# EAGLE board CH4D3M0 Rev 1.1 (EAGLE 7.7.0)
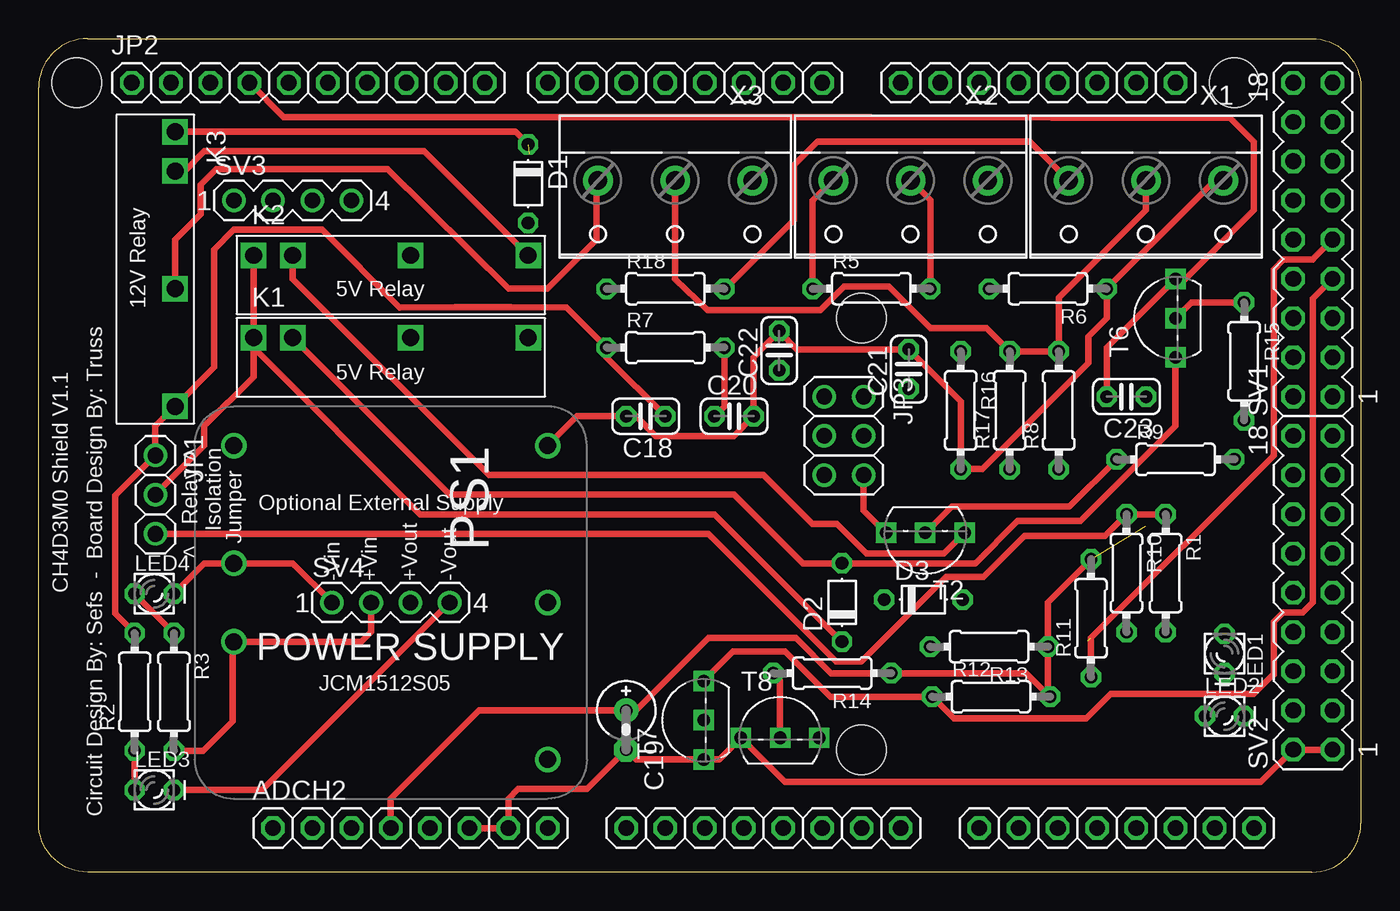
[diagram p0: board, top side]
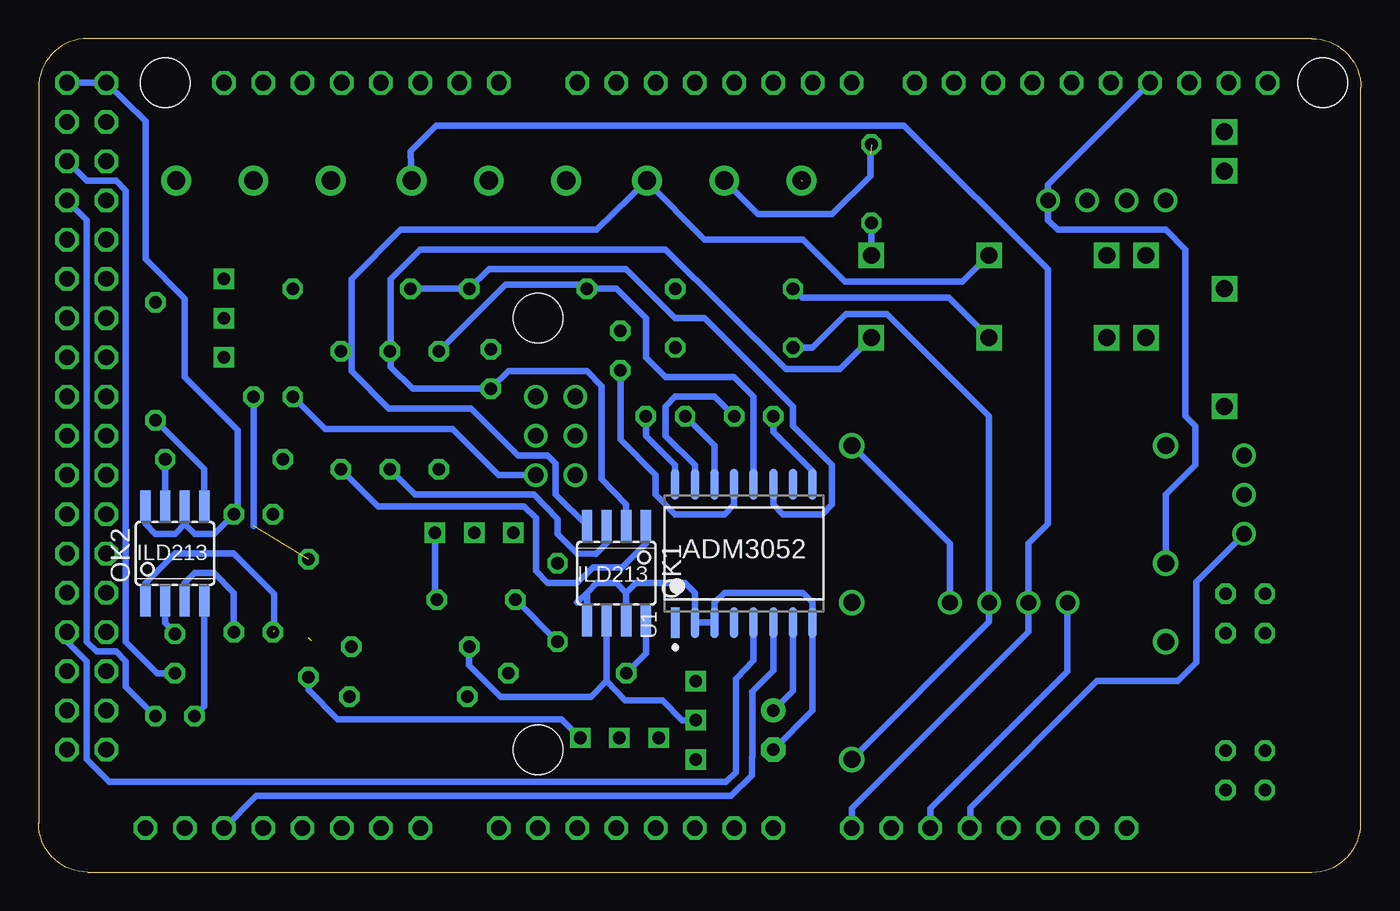
[diagram p1: board, bottom side, seen from below]

Size 85.6 x 53.97 mm. Coordinates in mm from the lower left corner, seen from the top.
Outline: 3.18,53.97 arc90 0,50.8 0,3.18 arc90 3.18,0 82.42,0 arc90 85.6,3.18 85.6,50.8 arc90 82.42,53.97 3.18,53.97
Copper layers (1*16): Top 0.035mm / dielectric 1.5mm / Bottom 0.035mm
Design rules "default *": minimum track width 0.15mm, minimum drill 0.3mm, track to track 0.15mm, track to pad 0.15mm, pad to pad 0.15mm, via to via 0.15mm, smd to smd 0.15mm, copper to edge 0.6mm, drill to drill 0.3mm, minimum pad ring 10mil, minimum via ring 10mil, stop-mask expansion 2mil, vias tented up to drill 1mil, thermal gap 10mil
Net classes: 0 default: width 0.15 mm, drill 0.3 mm, clearance 0.205 mm
Holes 3.2 mm at 2.48,51.12 77.41,51.12 53.28,35.88 53.28,7.94

## Footprints (pad centres in the part's own frame; a part is rotated, then mirrored left to right if it is on the bottom)
1X08 = drill 1.016 octagon: 1 -8.89,0; 2 -6.35,0; 3 -3.81,0; 4 -1.27,0; 5 1.27,0; 6 3.81,0; 7 6.35,0; 8 8.89,0
C025-024X044 = drill 0.813 octagon: 1 -1.27,0; 2 1.27,0
E2,5RE = drill 0.813 pad 1.575: + -1.27,0 | drill 0.813 pad 1.575 octagon: - 1.27,0
D-5 = drill 0.813 octagon: A 2.54,0; C -2.54,0
1X03 = drill 1.016: 1 -2.54,0; 2 0,0; 3 2.54,0
1X10 = drill 1.016 octagon: 1 -11.43,0; 2 -8.89,0; 3 -6.35,0; 4 -3.81,0; 5 -1.27,0; 6 1.27,0; 7 3.81,0; 8 6.35,0; 9 8.89,0; 10 11.43,0
2X03 = drill 1.016: 1 -2.54,-1.27; 2 -2.54,1.27; 3 0,-1.27; 4 0,1.27; 5 2.54,-1.27; 6 2.54,1.27
G6DN-1A = drill 1.1 square: 1 -8.89,1.27; 2 -6.35,1.27; 5 1.27,1.27; 8 8.89,1.27
LED_LD260 = drill 0.813 octagon: A -1.27,0; K 1.27,0
SOIC08 = smd 0.66 x 2.032: 1 -1.905,-3.073; 2 -0.635,-3.073; 3 0.635,-3.073; 4 1.905,-3.073; 5 1.905,3.073; 6 0.635,3.073; 7 -0.635,3.073; 8 -1.905,3.073
JCMXX = drill 1.1: 1 2.54,-10.16; 2 -2.54,-10.16; 3 -10.16,-10.16; 4 10.16,10.16; 5 0,10.16; 6 -10.16,10.16
0204/7 = drill 0.813 octagon: 1 -3.81,0; 2 3.81,0
MA09-2 = drill 1.016 octagon: 1 -10.16,-1.27; 2 -10.16,1.27; 3 -7.62,-1.27; 4 -7.62,1.27; 5 -5.08,-1.27; 6 -5.08,1.27; 7 -2.54,-1.27; 8 -2.54,1.27; 9 0,-1.27; 10 0,1.27; 11 2.54,-1.27; 12 2.54,1.27; 13 5.08,-1.27; 14 5.08,1.27; 15 7.62,-1.27; 16 7.62,1.27; 17 10.16,-1.27; 18 10.16,1.27
MA04-1 = drill 1.016: 1 -3.81,0; 2 -1.27,0; 3 1.27,0; 4 3.81,0
TO92-CBE = drill 0.813 square: B 0,0; C -2.54,0; E 2.54,0
TO92-EBC-OVAL = drill 0.813 square: B 0,-1.27; C 2.54,-1.27; E -2.54,-1.27
ANALOG_DEVICES_INC_ADM3052_0 = smd 1.998 x 0.542: 1 -4.478,4.445; 2 -4.478,3.175; 3 -4.478,1.905; 4 -4.478,0.635; 5 -4.478,-0.635; 6 -4.478,-1.905; 7 -4.478,-3.175; 8 -4.478,-4.445; 9 4.478,-4.445; 10 4.478,-3.175; 11 4.478,-1.905; 12 4.478,-0.635; 13 4.478,0.635; 14 4.478,1.905; 15 4.478,3.175; 16 4.478,4.445
W237-103 = drill 1.194 pad 1.93: 1 -5,-1.29; 2 0,-1.29; 3 5,-1.29

## Placement (x,y rotation side)
ADCH  [1X08]  69.79,2.86 0 top
ADCH2  [1X08]  24.07,2.86 0 top
ADCL  [1X08]  46.93,2.86 0 top
C18  100nF  [C025-024X044]  39.31,29.53 180 top
C19  22 uF  [E2,5RE]  38.04,9.21 270 top
C20  10 uF  [C025-024X044]  45.02,29.53 0 top
C21  47 nF  [C025-024X044]  56.33,32.57 90 top
C22  10 uF  [C025-024X044]  47.94,33.78 90 top
C23  100 nF  [C025-024X044]  70.42,30.8 180 top
COMMUNICATION  [1X08]  64.71,51.12 180 top
D1  [D-5]  31.69,44.58 270 top
D2  [D-5]  52.01,17.46 90 top
D3  [D-5]  57.28,17.65 0 top
JP1  [1X03]  7.56,24.45 270 top
JP2  [1X10]  17.46,51.12 0 top
JP3  [2X03]  52.13,28.26 270 top
K1  [G6DN-1A]  22.8,33.34 0 top
K2  [G6DN-1A]  22.8,38.67 0 top
K3  [G6DN-1A]  7.56,39.05 270 top
LED1  [LED_LD260]  76.77,14.16 270 top
LED2  [LED_LD260]  76.77,10.1 0 top
LED3  [LED_LD260]  7.49,5.33 0 top
LED4  [LED_LD260]  7.49,18.03 0 top
OK1  ILD213  [SOIC08]  48.2,19.37 180 bottom
OK2  ILD213  [SOIC08]  76.77,20.64 0 bottom
PS1  JCM1512S05  [JCMXX]  22.8,17.46 270 top
PWML  [1X08]  41.85,51.12 180 top
R1  1k  [0204/7]  72.96,19.37 270 top
R2  100  [0204/7]  6.22,11.68 90 top
R3  100  [0204/7]  8.76,11.68 270 top
R5  100  [0204/7]  53.91,37.78 0 top
R6  30  [0204/7]  65.34,37.78 180 top
R7  300  [0204/7]  40.58,33.97 0 top
R8  15k  [0204/7]  66.04,29.91 90 top
R9  510  [0204/7]  73.6,26.73 0 top
R10  1k  [0204/7]  70.42,19.37 270 top
R11  10k  [0204/7]  68.13,16.45 90 top
R12  10k  [0204/7]  61.66,11.37 0 top
R13  10k  [0204/7]  61.53,14.6 180 top
R14  10k  [0204/7]  51.37,12.89 180 top
R15  510  [0204/7]  78.04,33.08 270 top
R16  30  [0204/7]  59.69,29.91 270 top
R17  15k  [0204/7]  62.86,29.91 90 top
R18  200  [0204/7]  40.58,37.78 0 top
SV1  [MA09-2]  82.49,40.96 90 top
SV2  [MA09-2]  82.49,18.1 90 top
SV3  [MA04-1]  16.45,43.5 0 top
SV4  [MA04-1]  22.8,17.46 0 top
T2  [TO92-CBE]  57.4,21.97 180 top
T6  [TO92-CBE]  73.6,35.88 90 top
T7  2N2222  [TO92-EBC-OVAL]  41.78,9.84 90 top
T8  2N2222  [TO92-EBC-OVAL]  48.01,9.97 0 top
U1  ANALOG_DEVICES_INC_ADM3052ANALOG_DEVICES_INC_ADM3052_0_0  [ANALOG_DEVICES_INC_ADM3052_0]  39.94,20.64 90 bottom
X1  [W237-103]  71.69,43.5 180 top
X2  [W237-103]  56.45,43.5 180 top
X3  [W237-103]  41.21,43.5 180 top

## Library data of the parts
ADCH ADCH2 ADCL COMMUNICATION JP2 JP3 PWML = pinhead1
C18-C23 R1-R3 R5-R18 = rcl
D1-D3 = diode
JP1 = adafruit
K1-K3 = G6DN-1A
LED1-LED4 = eagle-ltspice; SPICEMODEL: NONE; SPICEPREFIX: D; SPICETYPE: diode
OK1 OK2 = optocoupler; MF: VISHAY/TELEFUNKEN; MPN: ILD213T; OC_FARNELL: 1045451; OC_NEWARK: 20H8680
PS1 = JCMxx
SV1 SV2 = con-lstb; OC_FARNELL: unknown; OC_NEWARK: unknown
SV3 SV4 = con-lstb1; OC_FARNELL: unknown; OC_NEWARK: unknown
T2 T6 = transistor1
T7 T8 = adafruit1
U1 = Analog Devices Inc - ADM3052; CENTROID_NOT_SPECIFIED: No; DATASHEET: http://www.analog.com/media/en/technical-documentation/data-sheets/ADM3052.pdf; DIGIKEY_DESCRIPTION: IC DGTL ISOLATOR 5KV 3CH CAN 16SOIC; DIGIKEY_PART_NUMBER: ADM3052BRWZ-REEL7; IPC_LAND_PATTERN_NAME: SOIC127P1032X250-16; LEAD_FREE: yes; MF: Analog Devices Inc; MFG_PACKAGE_IDENT: RW-16; MOUSER_PART_NUMBER: 584-ADM3052BRWZ-R7; MPN: ADM3052; PACKAGE: SOIC-16; PREFIX: U; ROHS: yes; TEMPERATURE_RANGE_HIGH: +85°C; TEMPERATURE_RANGE_LOW: -40°C
X1-X3 = con-wago-500_1; MPN: 237-103; OC_FARNELL: unknown; OC_NEWARK: 18M7116

## Nets
+3V3: ADCH2.4 C19.+ C23.1 R11.2 R12.2 R13.1 R14.1 U1.7
+5V: ADCH2.5 JP1.3 OK2.6 OK2.8 R1.1 R10.1 SV1.17 SV1.18
GND: ADCH2.6 ADCH2.7 C19.- C23.2 JP2.4 JP3.6 LED4.K OK1.5 OK1.7 PS1.2 SV2.1 SV2.2 SV3.4 SV4.1 T2.E T6.E T7.E T8.E U1.2 U1.3 U1.8
N$1: D2.C D3.C JP1.2 K1.1 K2.1
N$2: C18.1 JP1.1 K3.8 PS1.4 R2.2 R7.1 SV4.3 U1.15
N$3: C20.1 R7.2 U1.14
N$4: C22.1 U1.13
N$5: K3.5 X3.3
N$6: R18.2 X1.3
N$7: C18.2 C20.2 C21.2 C22.2 LED3.K PS1.6 R6.1 R16.2 SV4.4 U1.9 U1.16 X1.1
N$8: R5.2 R6.2 U1.11 X2.2
N$9: C21.1 K1.8 OK1.2
N$10: K1.5 R18.1
N$11: D1.C K3.1 R8.2 R17.2 X1.2 X3.2
N$12: OK1.1 R8.1
N$13: OK1.3 R17.1
N$14: ADCH2.8 PS1.1 R3.2 SV4.2 X2.1
N$15: D1.A K2.8 K3.2
N$16: K2.5 OK1.4 X3.1
N$17: OK1.6 R13.2 T7.B
N$18: OK1.8 R14.2 T8.B
N$19: R12.1 SV1.7 T7.C
N$20: ADCH.6 U1.6
N$21: R11.1 SV1.9 T8.C
N$22: SV2.7 U1.5
N$23: D2.A K1.2 T6.C
N$24: D3.A K2.2 T2.C
N$25: OK2.7 R9.2
N$26: LED1.A OK2.2
N$27: OK2.1 R10.2
N$28: OK2.3 R1.2
N$29: R9.1 T2.B
N$30: LED1.K SV1.13
N$31: R15.1 T6.B
N$32: OK2.5 R15.2
N$33: LED2.A OK2.4
N$34: LED2.K SV1.11
N$35: R5.1 R16.1 U1.12 X2.3
N$36: LED3.A R2.1
N$37: LED4.A R3.1

## Tracks (layer width: path | path; a pad name or v marks a point on that pad's centre or on a via)
+3V3  (1 unrouted)
  Top 0.406: ADCH2.4 22.8,4.76 28.51,10.48 C19.+ 38.67,10.48 43.37,15.18 49.02,15.18 51.31,12.89 R14.1 63.94,12.89 R12.2 65.34,11.49 R13.1 65.34,17.47 R11.2
  Bottom 0.406: C23.1 71.69,22.42 | U1.7 36.77,11.75 C19.+
+5V
  Top 0.406: R1.1 R10.1 69.02,21.78 63.82,21.78 61.15,19.11 58.74,19.11 53.28,13.65 51.62,13.65 43.37,21.91 JP1.3
  Bottom 0.15: 76.16,23.68 OK2.6 | 78.68,23.18 OK2.8 | 25.3,2.9 ADCH2.5
  Bottom 0.406: 78.68,23.18 78.68,22.54 78.04,21.91 76.77,21.91 76.14,22.54 | 76.14,22.54 75.5,21.91 74.23,21.91 R1.1 72.71,23.43 72.71,28.64 76.14,32.07 76.14,37.15 78.68,39.69 78.68,48.64 SV1.18 SV1.17 | 76.14,22.54 76.01,23.07 OK2.6 | 25.3,2.9 25.29,4.17 17.08,12.38 11.86,12.38 10.66,13.58 10.66,18.8 JP1.3
GND
  Top 0.406: C23.2 69.15,33.97 T6.E 74.23,38.42 78.68,42.86 78.68,47.31 77.15,48.83 53.85,48.89 15.87,48.89 JP2.4 | SV2.1 SV2.2 79.12,5.84 48.32,5.84 T8.E 44.07,7.3 T7.E 38.67,7.3 C19.- 35.5,5.4 31.05,5.4 30.42,4.76 ADCH2.7 ADCH2.6 | SV4.1 16.45,20 PS1.2 10.73,20 LED4.K | T2.E 53.4,23.43 JP3.6
  Bottom 0.15: 12.7,20.12 PS1.2 | SV3.4 | 14.12,50.65
  Bottom 0.406: OK1.5 50.1,18.1 | 50.1,18.1 49.47,18.73 48.2,18.73 47.56,18.1 | 47.56,18.1 OK1.7 | 47.56,18.1 46.93,18.73 43.75,18.73 43.12,18.1 U1.2 U1.3 41.85,17.46 41.21,18.1 36.13,18.1 35.5,17.46 U1.8 35.5,10.48 C19.- | 50.74,17.46 50.1,18.1 | SV3.4 20.26,44.51 14.12,50.65 14.1,50.67 | JP3.6 55.82,25.72 58.8,28.7 67.06,28.7 C23.2 | SV3.4 20.26,42.23 19.62,41.59 12.64,41.59 11.37,40.32 11.37,29.53 10.73,28.89 10.73,26.35 12.64,24.45 PS1.2 | ADCH2.6 27.88,4.13 18.99,13.02 SV4.1 | 14.12,50.65 JP2.4
N$1
  Top 0.406: D2.C 43.75,23.18 24.7,23.18 13.91,33.97 K1.1 | JP1.2 10.73,27.62 10.73,28.89 13.91,32.07 K1.1 | K2.1 K1.1
  Bottom 0.406: D2.C D3.C
N$2
  Top 0.406: C18.1 36.77,33.34 R7.1 34.16,36.58 arc1 23.37,36.58 18.35,41.59 12.64,41.59 11.37,40.32 11.37,32.7 K3.8 7.56,28.89 JP1.1 4.95,24.38 4.95,16.76 R2.2
  Bottom 0.15: 32.93,7.34 PS1.4
  Bottom 0.406: U1.15 43.12,26.35 45.02,28.26 45.02,30.16 44.39,30.8 41.85,30.8 C18.1 | R7.1 35.5,33.97 33.34,36.13 30.67,36.13 24.07,29.53 SV4.3 24.07,16.19 PS1.4
N$3
  Top 0.15: 44.39,33.79 R7.2
  Top 0.406: 44.39,33.79 44.39,30.16 C20.1
  Bottom 0.15: 41.85,25.08 U1.14
  Bottom 0.406: 41.85,25.08 41.85,27.62 C20.1
N$4
  Bottom 0.406: C22.1 47.94,28 45.66,25.72 45.66,24.45 44.39,23.18 41.21,23.18 40.58,23.81 U1.13
N$5  (1 unrouted)
  Top 0.406: K3.5 8.83,40.96 10.48,42.61 10.48,44.51 11.49,45.53 22.61,45.53 30.42,37.78 32.96,37.78 36.13,40.96 36.13,44.71
N$6
  Top 0.15: X1.3 66.83,44.79 66.61,44.77
  Top 0.406: R18.2 44.45,37.78 48.9,42.23 48.9,45.78 50.42,47.31 64.17,47.31 X1.3
N$7
  Top 0.406: PS1.6 34.86,29.53 C18.2 38.67,29.53 39.94,28.26 45.02,28.26 C20.2 46.29,33.34 C22.2 49.08,33.84 C21.2 59.69,30.48 R16.2 61.09,26.1 67.94,32.96 67.94,34.67 69.15,35.88 R6.1 76.14,44.77 76.04,44.77 X1.1 | LED3.K 14.47,5.33 SV4.4
  Bottom 0.15: 35.5,25.08 U1.9
  Bottom 0.406: C20.2 46.29,28.26 44.39,26.35 U1.16 | C18.2 38.04,28.51 35.5,25.97 U1.9 | SV4.4 26.61,21.27 PS1.6
N$8
  Top 0.406: R5.2 57.72,43.52 X2.2
  Bottom 0.406: R6.2 R5.2 56.45,39.05 47.56,39.05 44.39,35.88 42.48,35.88 36.77,30.16 36.77,28.89 34.23,26.35 34.23,23.81 34.86,23.18 37.4,23.18 38.04,23.81 U1.11
N$9
  Bottom 0.406: OK1.2 47.56,23.81 49.15,25.46 49.15,31.5 50.1,32.45 55.18,32.45 C21.1 | K1.8 33.72,32.57 37.21,32.57 45.02,40.32 60.9,40.32 62.8,38.42 62.8,32.7 61.4,31.3 C21.1 | C21.1
N$10
  Bottom 0.406: K1.5 26.67,37.21 36.19,37.21 R18.1
N$11  (1 unrouted)
  Top 0: 59.63,35.24
  Top 0.15: X3.2 41.27,44.79 41.21,44.77
  Top 0.406: X1.2 71.69,42.86 66.04,37.21 R8.2 R17.2 61.34,35.24 59.63,35.24 57.72,35.24 55.05,37.91 52.13,37.91 50.61,36.38 43.31,36.38 41.21,38.42 41.21,44.77 | K3.1 30.86,47.94 D1.C
  Bottom 0.406: 31.75,46.48 31.75,45.09 34.23,42.61 39.03,42.61 X3.2
N$12
  Bottom 0.406: OK1.1 46.29,21.27 47.81,19.75 49.72,19.75 50.74,18.73 52.64,18.73 53.4,19.49 53.4,22.92 54.16,23.68 62.04,23.67 63.61,23.67 R8.1
N$13
  Bottom 0.406: OK1.3 48.83,21.27 49.52,20.62 50.74,20.64 52.01,21.91 52.01,22.86 53.53,24.45 61.21,24.45 R17.1
N$14
  Top 0.406: SV4.2 21.53,15.56 20.89,14.92 PS1.1 12.57,14.85 12.57,9.77 10.66,7.87 R3.2
  Bottom 0.406: X2.1 61.53,46.67 59.88,48.32 29.59,48.32 20.26,39.05 20.26,22.54 21.53,21.27 SV4.2 21.53,15.56 32.96,4.13 ADCH2.8
N$15
  Top 0.406: K3.2 9.46,45.4 10.73,46.67 24.95,46.67 K2.8
  Bottom 0.406: D1.A K2.8
N$16
  Bottom 0.406: K2.5 25.78,38.23 33.4,38.23 36.13,40.96 42.48,40.96 46.29,44.77 X3.1 49.47,41.59 62.17,41.59 65.34,38.42 65.34,32.45 62.93,30.03 57.59,30.03 54.55,26.99 52.64,26.99 52.13,26.48 52.13,24.47 OK1.4
N$17
  Bottom 0.406: 48.83,12.38 47.62,11.11 45.21,11.11 43.94,9.84 T7.B | OK1.6 48.83,12.38 | 48.83,12.38 49.85,11.37 55.69,11.37 57.72,13.4 R13.2
N$18
  Top 0.406: R14.2 48.01,12.38 T8.B
  Bottom 0.406: R14.2 46.29,14.16 OK1.8
N$19
  Top 0.406: SV1.7 82.49,37.15 82.49,17.46 81.85,16.83 80.58,16.83 79.95,16.19 79.95,12.76 79.88,12.76 78.68,11.56 69.41,11.56 67.82,9.97 59.24,9.97 R12.1 51.24,11.37 48.32,14.29 44.96,14.29 T7.C
N$20
  Bottom 0.406: U1.6 38.04,13.08 39.43,11.68 39.37,11.62 39.37,7.49 39.43,7.43 39.43,6.29 40.77,4.95 71.5,4.95 ADCH.6
N$21  (1 unrouted)
  Top 0.406: SV1.9 82.49,39.69 82.49,39.67 80.58,39.67 79.95,39.03 79.95,26.99 68.13,15.17 R11.1
  Bottom 0.406: R11.1 68.13,11.8 66.23,9.91 51.75,9.91 T8.C
N$22
  Bottom 0.406: SV2.7 83.76,14.92 82.49,13.65 82.49,7.3 81.03,5.84 41.08,5.84 40.45,6.48 40.45,12.51 39.31,13.72 U1.5
N$23
  Top 0.406: T6.C 73.6,28.89 67.44,22.73 63.37,22.73 60.64,20 | K1.2 26.61,24.45 45.02,24.45 49.47,20 D2.A 60.64,20 | 60.64,20
N$24
  Top 0.406: K2.2 16.45,38.42 29.15,25.72 46.93,25.72 50.1,22.54 51.69,22.54 53.59,20.64 58.61,20.64 T2.C
  Bottom 0.406: D3.A 59.94,17.78 T2.C
N$25
  Bottom 0.406: R9.2 OK2.7
N$26
  Bottom 0.15: 77.23,17.46 OK2.2
  Bottom 0.406: LED1.A 77.41,16.13 OK2.2
N$27  (1 unrouted)
  Bottom 0.15: 78.68,18.1 78.47,17.64 OK2.1
  Bottom 0.406: 78.68,18.1 78.68,18.73 76.77,20.64 72.96,20.64 70.35,18.03 70.35,15.62
N$28
  Bottom 0.15: 76.14,18.1 75.99,17.64 OK2.3
  Bottom 0.406: R1.2 72.96,18.1 74.23,19.37 75.5,19.37 76.14,18.73 76.14,18.1
N$29
  Top 0.406: T2.B 59.12,23.69 66.74,23.69 R9.1
N$30
  Bottom 0.406: SV1.13 82.49,44.77 80.58,44.77 79.95,44.13 79.95,14.9 77.93,12.89 LED1.K
N$31
  Top 0.406: T6.B 74.61,36.89 R15.1
N$32
  Bottom 0.15: 74.87,23.81 OK2.5
  Bottom 0.406: 74.87,23.81 74.87,26.1 R15.2
N$33
  Bottom 0.15: 74.74,17.46 OK2.4
  Bottom 0.406: LED2.A 74.87,10.73 OK2.4
N$34
  Bottom 0.406: SV1.11 82.49,42.23 82.49,14.92 81.85,14.29 80.58,14.29 79.95,13.65 79.95,12 LED2.K
N$35
  Top 0.15: X2.3 51.57,44.79 51.37,44.77
  Top 0.406: 51.37,44.77 50.1,43.5 R5.1
  Bottom 0.15: 39.31,25.08 U1.12
  Bottom 0.406: 39.31,25.08 39.31,30.8 40.58,32.07 45.02,32.07 46.29,33.34 46.29,35.88 48.2,37.78 R5.1 50.36,38.04 54.48,38.04 54.99,38.04 55.37,38.04 R16.1
N$36
  Top 0.406: R2.1 LED3.A
N$37
  Top 0.406: LED4.A R3.1

## Text on the board
tPlace: 12V Relay | 5V Relay | 5V Relay | < | Isolation | Relay | Optional External Supply | < | Jumper | -Vin | +Vin | +Vout | -Vout | CH4D3M0 Shield V1.1 | POWER SUPPLY | JCM1512S05 | Circuit Design By: Sefs - Board Design By: Truss
bPlace: ADM3052 | ILD213 | ILD213